# Altium PCB PCB2.PcbDoc
Units mm, origin at the board's own origin, x right, y up, seen from the top; angles counter-clockwise.
Board outline 35.05 x 35.05 mm, 2 copper layers (Top Layer, Bottom Layer); 9 components, 5 nets, 20 pads, 0 vias.
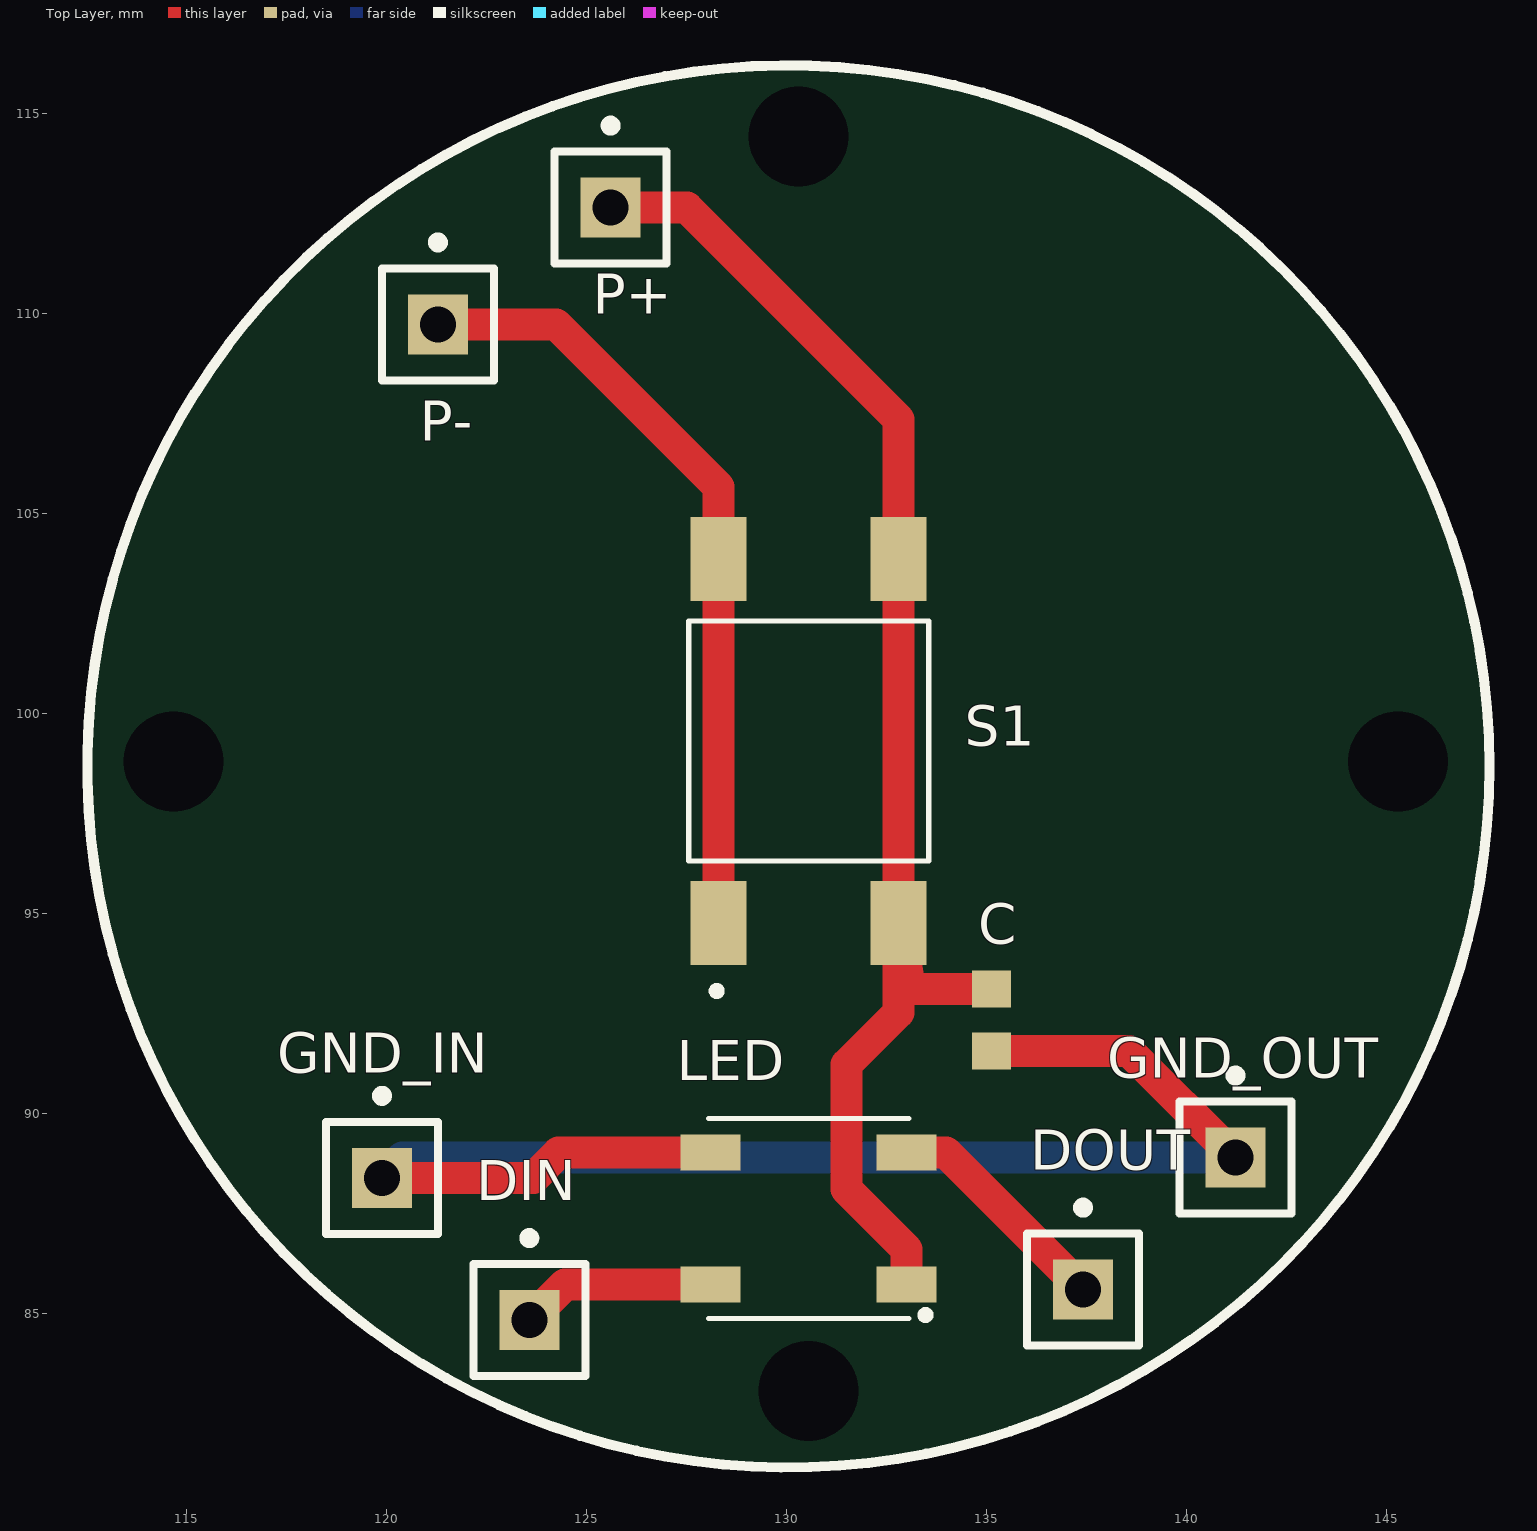
[diagram p0: Top Layer view]
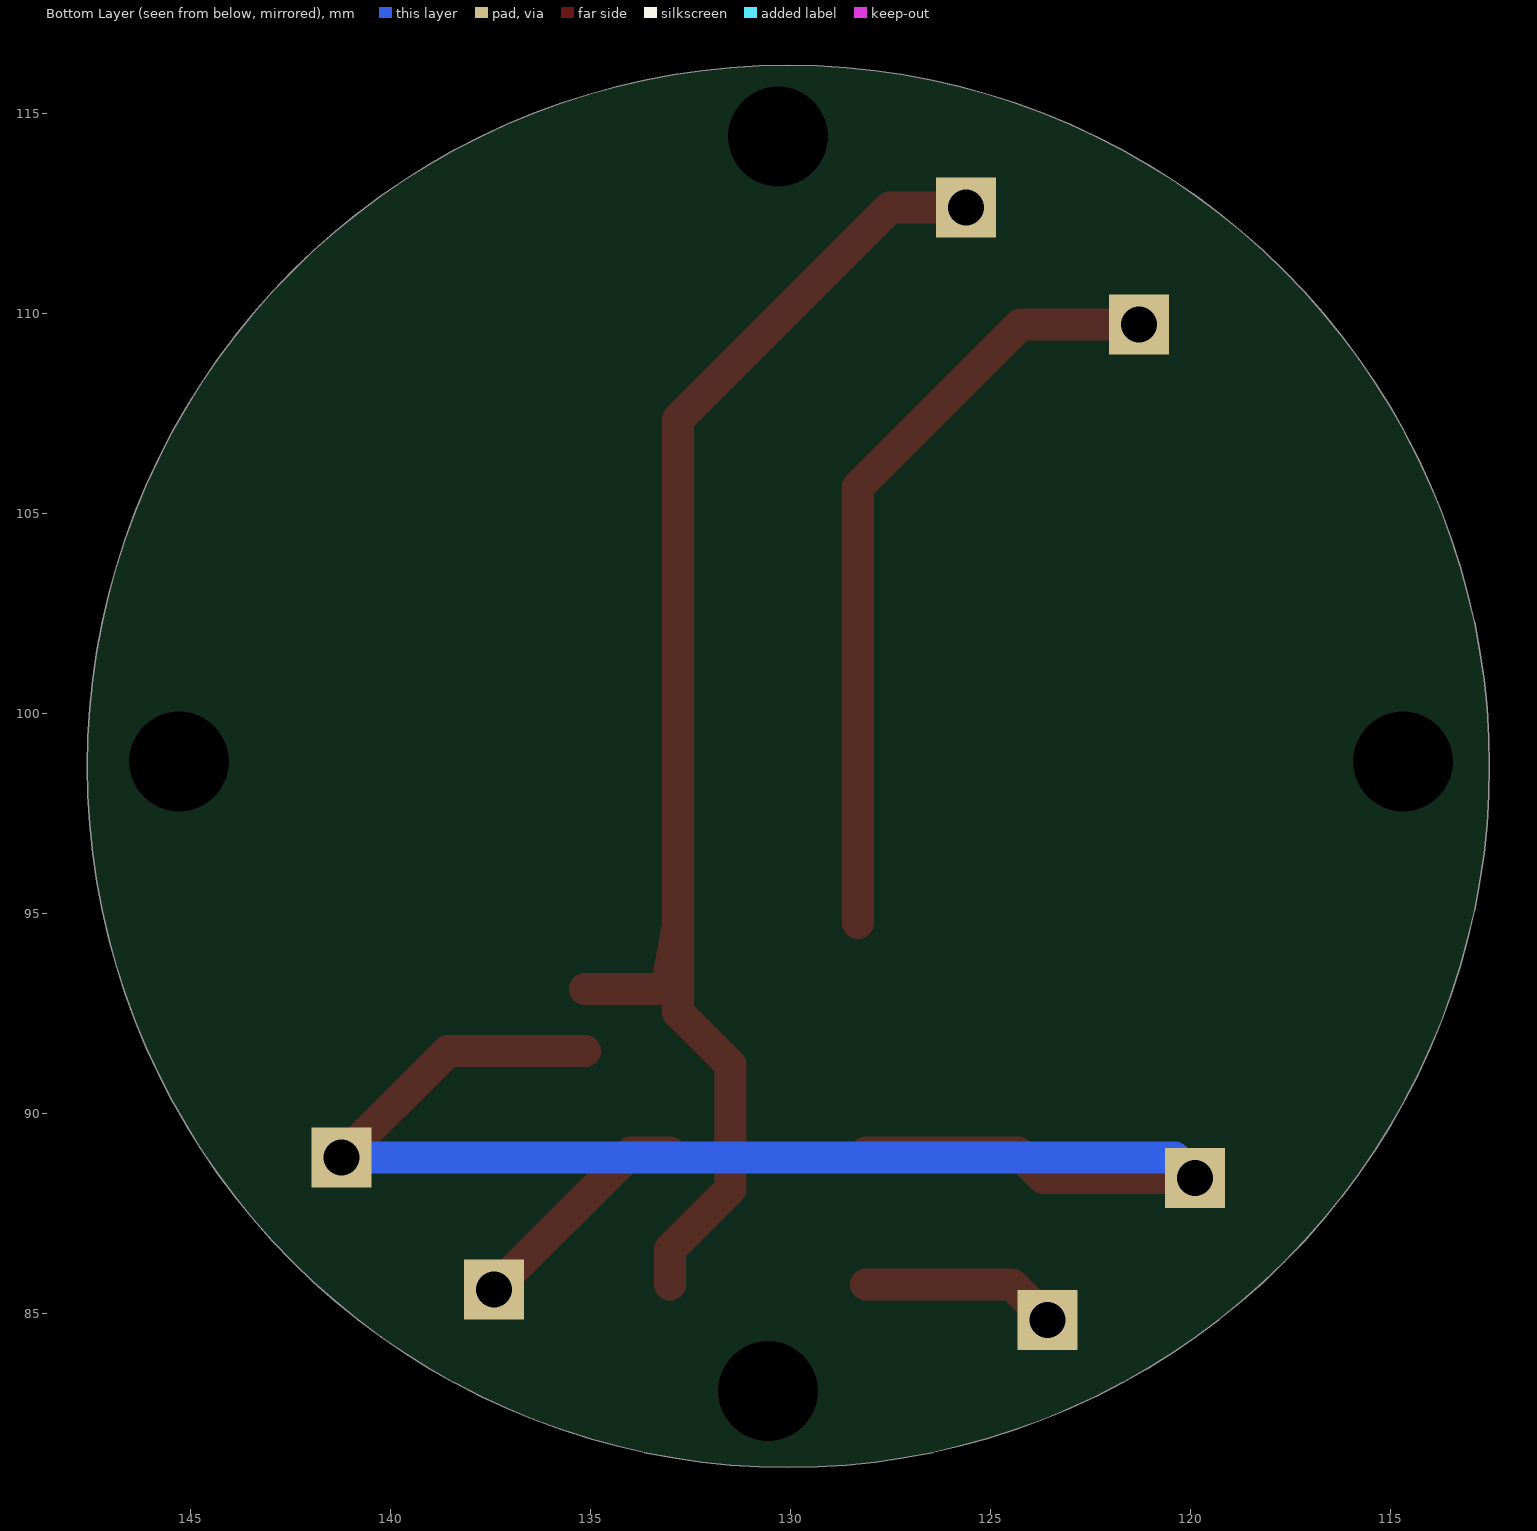
[diagram p1: Bottom Layer view, seen from below]
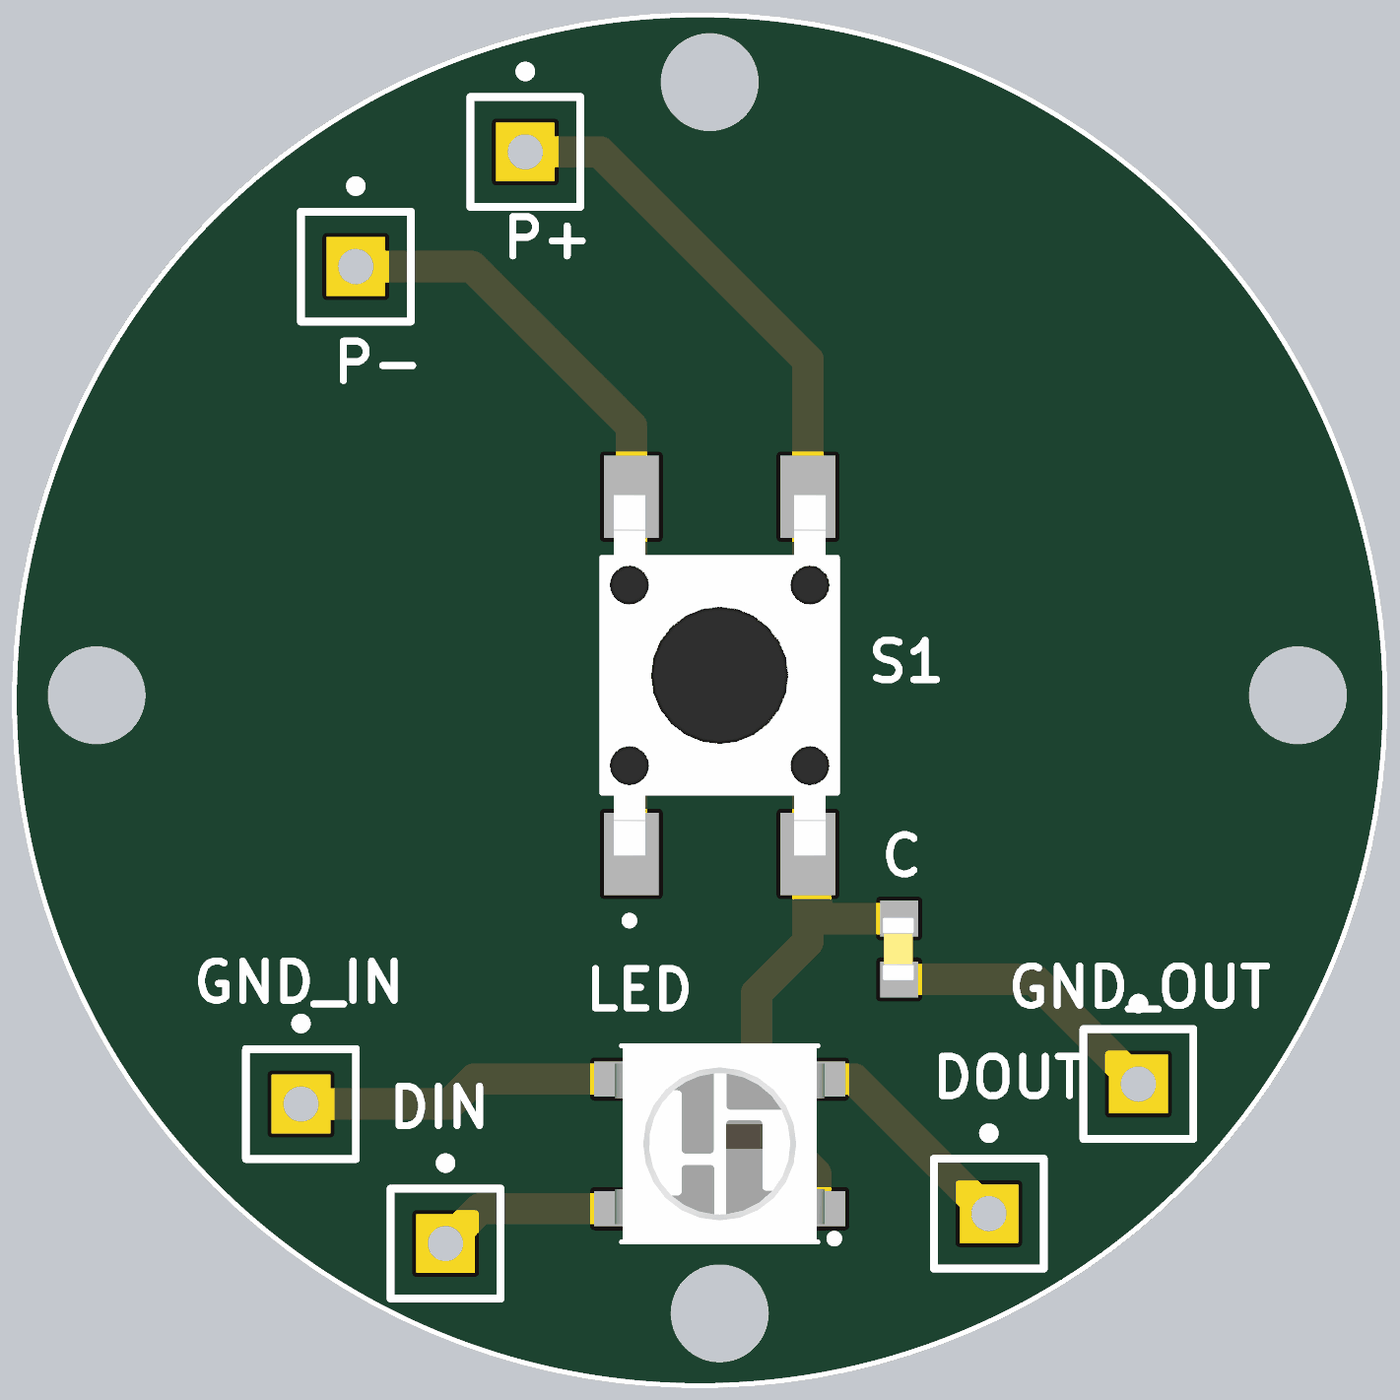
[diagram p2: 3D render of the assembled board from above, using the file's embedded part models]

## Layer stack, top to bottom
Top Solder: solder mask 0.0102, Solder Resist, Dk 3.5
Top Layer: signal copper 0.0356
Dielectric 1: dielectric 0.32, FR-4, Dk 4.8
Bottom Layer: signal copper 0.0356
Bottom Solder: solder mask 0.0102, Solder Resist, Dk 3.5

## Board outline
112.522,98.679 ccw(c130.048,98.679) 130.048,81.153 ccw(c130.048,98.679) 147.574,98.679 ccw(c130.048,98.679) 130.048,116.205 ccw(c130.048,98.679)

## Design rules (kind name [scope] priority, off if disabled: settings)
Clearance [All] p1: gap=0.254 ignorepadtopadclearanceinfootprint=FALSE except(0: Arc-Hole Track-Hole SMDPad-Hole THPad-Hole Via-Hole Fill-Hole Poly-Hole Region-Hole Text-Hole)
PolygonConnect [All] p1: connectstyle=Relief reliefconductorwidth=0.254 reliefentries=4 polygonreliefangle="90 Angle" airgapwidth=0.254
RoutingVias [All] p1: holewidth=0.711 width=1.27 viastyle="Through Hole" minholewidth=0.711 minwidth=1.27 maxholewidth=0.711 maxwidth=1.27
SolderMaskExpansion [All] p1: expansion=0.102 istentingtop=FALSE
Width [All] p1: maxlimit=1 minlimit=0.254 preferedwidth=0.8
30 further rules are at their usual default settings.

## Components (designator, comment, footprint, x,y, rotation, side; value= is the part's Value field where it differs from the comment)
C "MC0603B105K160CT" CAPC1608X87N 135.128,92.342 r270 top
DIN "Plug" PIN1 123.571,84.836 r0 top
DOUT "Plug" PIN1 137.414,85.598 r0 top
GND_IN "Plug" PIN1 119.888,88.392 r0 top
GND_OUT "Plug" PIN1 141.224,88.9 r0 top
LED "WS2812B" LED_WS2812B-B 130.556,87.376 r180 top
P+ "Plug" PIN1 125.603,112.649 r0 top
P- "Plug" PIN1 121.285,109.728 r0 top
S1 "2-1437565-7" SW_2-1437565-7 130.556,99.314 r90 top

## Footprints (in the part's own frame and the unit in brackets; to place one, negate y for a bottom-side part, rotate by r counter-clockwise, add the part's x,y. Pads: shape width x height; smd on the part's side, far side on the other; paste and mask are expansions set on the pad)
CAPC1608X87N [mm]
  rect 0.92x0.97 smd: 1(-0.775,0) 2(0.775,0)
  body extent -0.8,-0.42 0.8,0.38, height 0.79
LED_WS2812B-B [mm]
  rect 1.5x0.9 smd: 1(-2.45,1.65) 2(-2.45,-1.65) 3(2.45,-1.65) 4(2.45,1.65)
  silkscreen extent -3.02,-2.5 2.5,2.51, body extent -2.68,-2.47 2.68,2.48, height 1.7
PIN1 [mm] "Connector; Plug"
  rect 1.5x1.5 hole 0.9: 1(0,0)
  silkscreen extent -1.4,-1.4 1.4,2.17
SW_2-1437565-7 [mm]
  rect 2.1x1.4 smd: 1(-4.55,2.25) 2(4.55,2.25) 3(-4.55,-2.25) 4(4.55,-2.25)
  silkscreen extent -6.35,-3 3,3, body extent -4.6,-3 4.6,3, height 4.6

## Part data
C: "Cap, Mlcc, X7r, 1uf, 16v, 0603", Package="0603 Multicomp", Availability=Unavailable, MF=Multicomp, MP=MC0603B105K160CT, Price=None, SnapEDA_Link=https://www.snapeda.com/parts/MC0603B105K160CT/Multicomp/view-part/276886/?ref=snap
LED: "Raspberry Pi HAT _40 pin_ Wheeled Robotics Kit", Package=None, Availability=Unavailable, MF="SparkFun Electronics", MP=WS2812B, Price=None, SnapEDA_Link=https://www.snapeda.com/parts/WS2812B/Worldsemi/view-part/1038297/?ref=snap
S1: "Tactile Switch SPST-NO Top Actuated Surface Mount", Contact_Current_Rating="50 mA", Package=None, Availability=Unavailable, Configuration_Pole-Throw="Single Pole - Single Throw", MF="TE Connectivity", MP=2-1437565-7, Price=None, SnapEDA_Link=https://www.snapeda.com/parts/2-1437565-7/TE%20Connectivity%20ALCOSWITCH%20Switches/view-part/214770/?ref=snap, TE_purchase_URL=https://www.te.com/usa-en/product-2-1437565-7.html?te_bu=Cor&te_type=disp&te_campaign=seda_glo_cor-seda-global-disp-prtnr-fy19-seda-model-bom-cta_sma-317_1&elqCampaignId=32493
DIN DOUT GND_IN GND_OUT P+ P-: LatestRevisionDate=17-Jul-2002, LatestRevisionNote="Re-released for DXP Platform.", Publisher="Altium Limited"

## Free pads (board coordinates)
  round 0 hole 2.5 unplated paste-1000 mask+0: 13(114.681,98.806) 13(130.302,114.427) 13(130.556,83.058) 13(145.288,98.806)

## Nets (pads, with @x,y where several pads share a name; then routed paths per layer and width w, separated by ;. In a path a pad name is that pad's centre, name@x,y a point inside that pad or via, vN(x,y) a via of type N, cw(c..) or ccw(c..) an arc to the next point about the centre after c; other vN are vias at no path point)
NetC_1: C.1 LED.1 P+.1 S1.3 S1.4 | length 35.6
  Top Layer w0.8: P+.1@125.857,112.649 127.508,112.649 132.806,107.351 S1.4 S1.3 ; LED.1 133.006,86.602 131.496,88.113 131.496,91.222 132.806,92.532 S1.3 ; C.1 133.096,93.117 S1.3
NetC_2: C.2 GND_IN.1 GND_OUT.1 LED.3 | length 37.2
  Top Layer w0.8: GND_IN.1 123.673,88.392 124.307,89.026 LED.3 ; C.2 138.557,91.567 GND_OUT.1
  Bottom Layer w0.8: GND_IN.1 120.396,88.9 GND_OUT.1
NetDIN_1: DIN.1 LED.4 | length 4.9
  Top Layer w0.8: DIN.1 124.461,85.726 LED.4
NetDOUT_1: DOUT.1 LED.2 | length 5.8
  Top Layer w0.8: LED.2 133.986,89.026 DOUT.1
NetP-_1: P-.1 S1.1 S1.2 | length 19.6
  Top Layer w0.8: P-.1 124.242,109.728 128.306,105.664 S1.2 S1.1

## Silkscreen, mask and mechanical layers (free items; w line width, h text height)
Top Overlay:
  circle w0.254: c130.048,98.679 r17.526